# EAGLE board main (1) (EAGLE 9.6.2)
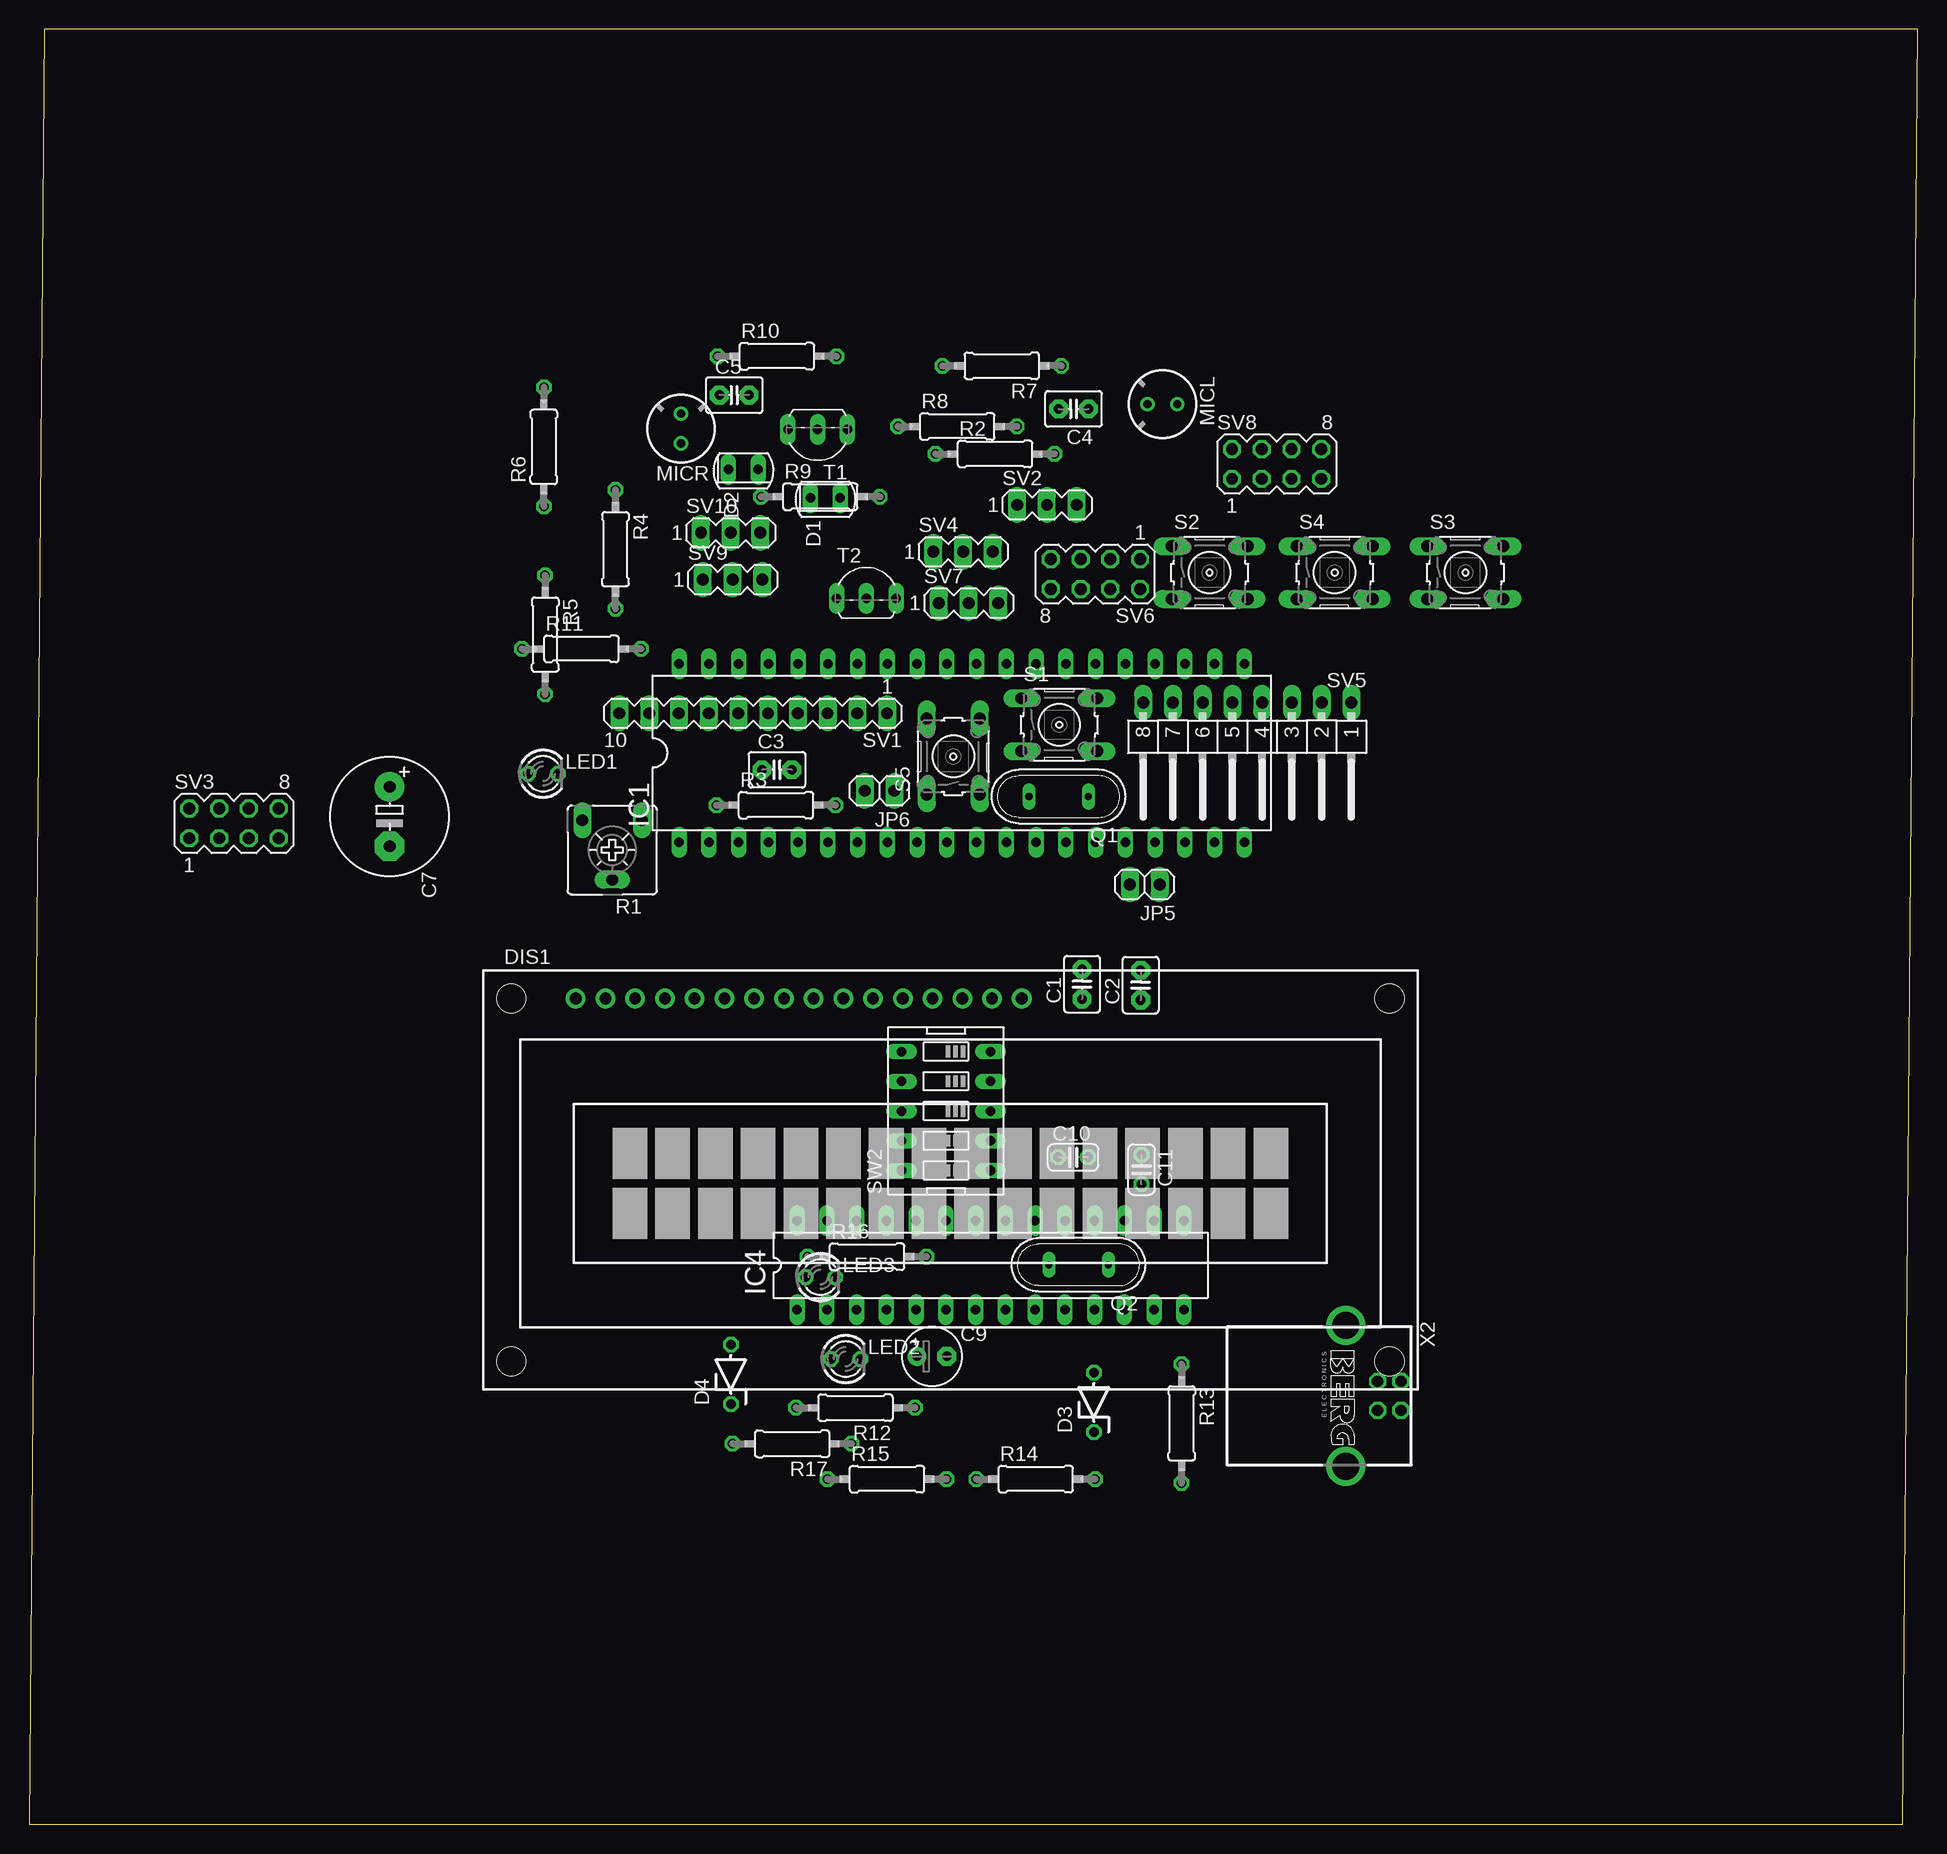
[diagram p0: board, top side]
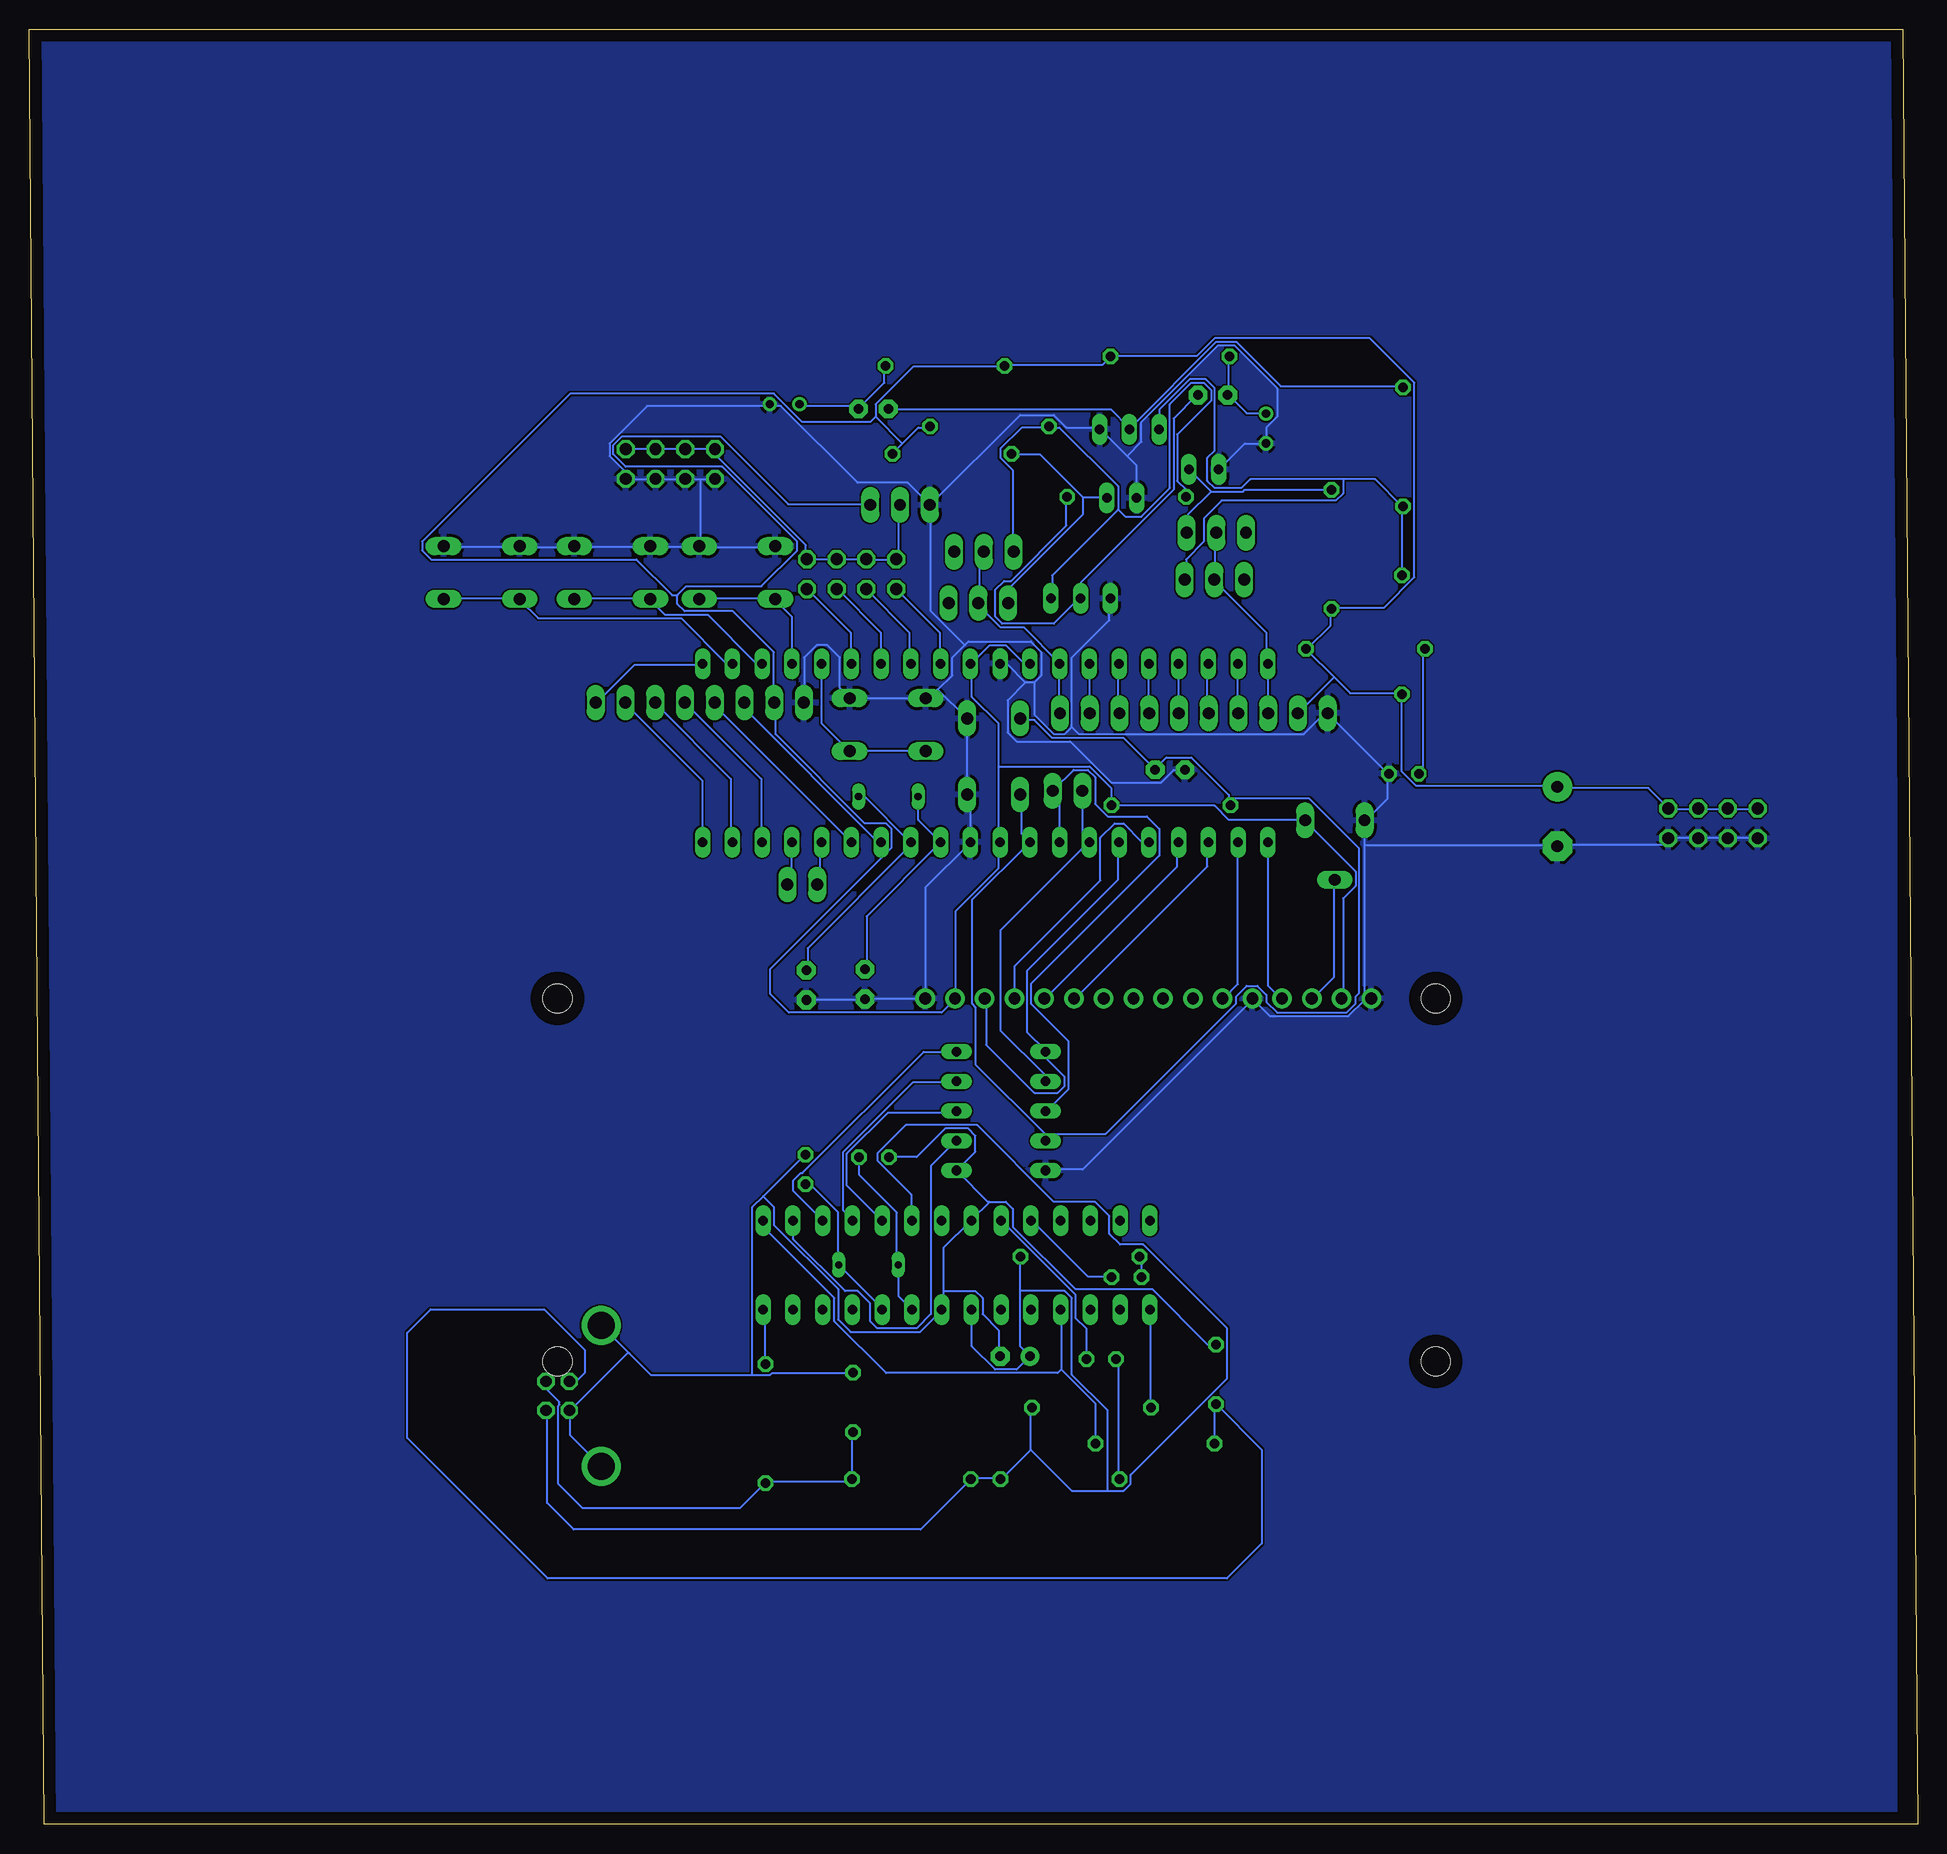
[diagram p1: board, bottom side, seen from below]

Size 161.27 x 153.34 mm. Coordinates in mm from the lower left corner, seen from the top.
Outline: 0,0 160,0 161.27,153.34 1.27,153.34 0,0
Copper layers (1*16): Top 0.035mm / dielectric 1.5mm / Bottom 0.035mm
Design rules "default": minimum track width 6mil, minimum drill 0.35mm, track to track 6mil, track to pad 6mil, pad to pad 6mil, via to via 6mil, smd to smd 6mil, copper to edge 40mil, drill to drill 6mil, minimum pad ring 10mil, minimum via ring 8mil, stop-mask expansion 4mil, vias tented up to drill 0mil, thermal gap 10mil

## Footprints (pad centres in the part's own frame; a part is rotated, then mirrored left to right if it is on the bottom)
C2.5-3 = drill 0.813 pad 1.6 octagon: 1 -1.27,0; 2 1.27,0
E5-10,5 = drill 1.016 pad 2.54: + -2.54,0 | drill 1.016 pad 2.54 octagon: - 2.54,0
E2,5-5 = drill 0.813 pad 1.6: + -1.27,0 | drill 0.813 pad 1.6 octagon: - 1.27,0
C025-024X044 = drill 0.813 octagon: 1 -1.27,0; 2 1.27,0
SFH225 = drill 0.813 long: A 0,1.27; K 0,-1.27
ZDIO-5 = drill 0.813 octagon: A 2.54,0; C -2.54,0
TUXGR_16X2_R2 = drill 1 pad 1.676: 1 -32,15.5; 2 -29.46,15.5; 3 -26.92,15.5; 4 -24.38,15.5; 5 -21.84,15.5; 6 -19.3,15.5; 7 -16.76,15.5; 8 -14.22,15.5; 9 -11.68,15.5; 10 -9.14,15.5; 11 -6.6,15.5; 12 -4.06,15.5; 13 -1.52,15.5; 14 1.02,15.5; 15 3.56,15.5; 16 6.1,15.5 | hole 2.5: -37.5,-15.5; 37.5,-15.5; -37.5,15.5; 37.5,15.5
DIL40 = drill 0.813 long: 1 -24.13,-7.62; 2 -21.59,-7.62; 3 -19.05,-7.62; 4 -16.51,-7.62; 5 -13.97,-7.62; 6 -11.43,-7.62; 7 -8.89,-7.62; 8 -6.35,-7.62; 9 -3.81,-7.62; 10 -1.27,-7.62; 11 1.27,-7.62; 12 3.81,-7.62; 13 6.35,-7.62; 14 8.89,-7.62; 15 11.43,-7.62; 16 13.97,-7.62; 17 16.51,-7.62; 18 19.05,-7.62; 19 21.59,-7.62; 20 24.13,-7.62; 21 24.13,7.62; 22 21.59,7.62; 23 19.05,7.62; 24 16.51,7.62; 25 13.97,7.62; 26 11.43,7.62; 27 8.89,7.62; 28 6.35,7.62; 29 3.81,7.62; 30 1.27,7.62; 31 -1.27,7.62; 32 -3.81,7.62; 33 -6.35,7.62; 34 -8.89,7.62; 35 -11.43,7.62; 36 -13.97,7.62; 37 -16.51,7.62; 38 -19.05,7.62; 39 -21.59,7.62; 40 -24.13,7.62
DIL28-3 = drill 0.813 long: 1 -16.51,-3.81; 2 -13.97,-3.81; 3 -11.43,-3.81; 4 -8.89,-3.81; 5 -6.35,-3.81; 6 -3.81,-3.81; 7 -1.27,-3.81; 8 1.27,-3.81; 9 3.81,-3.81; 10 6.35,-3.81; 11 8.89,-3.81; 12 11.43,-3.81; 13 13.97,-3.81; 14 16.51,-3.81; 15 16.51,3.81; 16 13.97,3.81; 17 11.43,3.81; 18 8.89,3.81; 19 6.35,3.81; 20 3.81,3.81; 21 1.27,3.81; 22 -1.27,3.81; 23 -3.81,3.81; 24 -6.35,3.81; 25 -8.89,3.81; 26 -11.43,3.81; 27 -13.97,3.81; 28 -16.51,3.81
1X02 = drill 1.016 long: 1 -1.27,0; 2 1.27,0
LED3MM = drill 0.813 octagon: A -1.27,0; K 1.27,0
F6050AP = drill 0.7 pad 1.2: 1 0,1.27; 2 0,-1.27
QS = drill 0.61 long: 1 -2.54,0; 2 2.54,0
CA6V = drill 1.016 long: A -2.54,-2.54; E 2.54,-2.54; S 0,2.54
0207/10 = drill 0.813 octagon: 1 -5.08,0; 2 5.08,0
B3F-10XX = drill 1.016 long: 1 -3.251,2.261; 2 3.251,2.261; 3 -3.251,-2.261; 4 3.251,-2.261
MA10-1 = drill 1.016 long: 1 -11.43,0; 2 -8.89,0; 3 -6.35,0; 4 -3.81,0; 5 -1.27,0; 6 1.27,0; 7 3.81,0; 8 6.35,0; 9 8.89,0; 10 11.43,0
MA03-1 = drill 1.016 long: 1 -2.54,0; 2 0,0; 3 2.54,0
MA04-2 = drill 1.016 octagon: 1 -3.81,-1.27; 2 -3.81,1.27; 3 -1.27,-1.27; 4 -1.27,1.27; 5 1.27,-1.27; 6 1.27,1.27; 7 3.81,-1.27; 8 3.81,1.27
MA08-1W = drill 1.016 long: 1 -8.89,0; 2 -6.35,0; 3 -3.81,0; 4 -1.27,0; 5 1.27,0; 6 3.81,0; 7 6.35,0; 8 8.89,0
EDG-05 = drill 0.813 long: 1 -5.08,-3.81; 2 -2.54,-3.81; 3 0,-3.81; 4 2.54,-3.81; 5 5.08,-3.81; 6 5.08,3.81; 7 2.54,3.81; 8 0,3.81; 9 -2.54,3.81; 10 -5.08,3.81
TO92-EBC = drill 0.813 long: B 0,-1.27; C 2.54,-1.27; E -2.54,-1.27
PN61729-S = drill 0.95 octagon: 1 1.25,4.71; 2 -1.25,4.71; 3 -1.25,2.71; 4 1.25,2.71 | drill 2.3 pad 2.9: S1 -6.02,0; S2 6.02,0

## Placement (x,y rotation side)
C1  22p  [C2.5-3]  89.91,71.77 90 top
C2  22p  [C2.5-3]  94.91,71.69 90 top
C3  10nF  [C2.5-3]  63.85,90.09 0 top
C4  100nF  [C2.5-3]  89.18,120.91 180 top
C5  100nF  [C2.5-3]  60.2,122.09 0 top
C7  1000uF/16V  [E5-10,5]  30.77,86.09 270 top
C9  10uF/16V  [E2,5-5]  77.09,39.98 0 top
C10  22pF  [C025-024X044]  89.14,56.98 0 top
C11  22pF  [C025-024X044]  94.98,55.94 270 top
D1  SFH225  [SFH225]  67.98,113.31 270 top
D2  SFH225  [SFH225]  60.98,115.74 270 top
D3  DZ3,6V  [ZDIO-5]  90.91,36.06 90 top
D4  DZ3,6V  [ZDIO-5]  59.91,38.44 90 top
DIS1  TUXGR_16X2_R2  [TUXGR_16X2_R2]  78.66,55.05 0 top
IC1  MEGA16-P  [DIL40]  79.63,91.53 0 top
IC4  MEGA8-P  [DIL28-3]  82.09,47.77 0 top
JP5  [1X02]  95.26,80.29 180 top
JP6  [1X02]  72.61,88.29 180 top
LED1  merah  [LED3MM]  43.88,89.76 0 top
LED2  Merah  [LED3MM]  69.72,39.76 0 top
LED3  hijau  [LED3MM]  67.56,46.76 0 top
MICL  MC  [F6050AP]  96.77,121.31 270 top
MICR  MC  [F6050AP]  55.66,119.23 180 top
Q1  8MHz  [QS]  87.91,87.8 180 top
Q2  12MHz  [QS]  89.61,47.8 180 top
R1  20K  [CA6V]  49.78,83.23 180 top
R2  56K  [0207/10]  82.47,117.06 0 top
R3  10K  [0207/10]  63.77,87.06 0 top
R4  56K  [0207/10]  50.06,108.93 270 top
R5  10K  [0207/10]  44.06,101.63 270 top
R6  100K  [0207/10]  43.94,117.67 90 top
R7  10K  [0207/10]  83.05,124.59 180 top
R8  10K  [0207/10]  79.25,119.41 0 top
R9  100K  [0207/10]  67.55,113.41 0 top
R10  10K  [0207/10]  63.85,125.41 0 top
R11  330  [0207/10]  47.15,100.41 0 top
R12  10K  [0207/10]  70.55,35.59 180 top
R13  68  [0207/10]  98.41,34.25 270 top
R14  2K2  [0207/10]  85.95,29.49 0 top
R15  330  [0207/10]  73.25,29.49 0 top
R16  330  [0207/10]  71.55,48.49 0 top
R17  68  [0207/10]  65.15,32.51 180 top
S1  [B3F-10XX]  87.96,93.93 0 top
S2  [B3F-10XX]  100.8,106.93 0 top
S3  [B3F-10XX]  122.64,106.93 0 top
S4  [B3F-10XX]  111.48,106.93 0 top
S5  [B3F-10XX]  78.91,91.22 90 top
SV1  [MA10-1]  61.82,94.91 180 top
SV2  [MA03-1]  86.91,112.71 0 top
SV3  [MA04-2]  17.48,85.5 0 top
SV4  [MA03-1]  79.75,108.71 0 top
SV5  [MA08-1W]  104.01,95.82 180 top
SV6  [MA04-2]  91.05,106.8 180 top
SV7  [MA03-1]  80.22,104.33 0 top
SV8  [MA04-2]  106.52,116.2 0 top
SV9  [MA03-1]  60.06,106.33 0 top
SV10  [MA03-1]  59.9,110.33 0 top
SW2  [EDG-05]  78.28,60.94 90 top
T1  [TO92-EBC]  67.33,117.91 180 top
T2  [TO92-EBC]  71.49,105.98 0 top
X2  PN61729-S  [PN61729-S]  112.43,36.6 270 top

## Library data of the parts
C1-C5 = capacitor-wima
C7 C9-C11 R2-R11 = rcl
D1 D2 = opto-trans-siemens; OC_FARNELL: unknown; OC_NEWARK: unknown
D3 D4 = diode
DIS1 = display-lcd; OC_FARNELL: unknown; OC_NEWARK: unknown
IC1 = atmel; MPN: ATMEGA16-16PU; OC_FARNELL: 9171142; OC_NEWARK: 01M6885
IC4 = atmel
JP5 JP6 = pinhead
LED1-LED3 = led
MICL MICR = microphon
Q1 Q2 SW2 = special
R1 = pot
R12-R17 = resistor
S1-S5 = switch-omron; MPN: B3F-1000; OC_FARNELL: 176432; OC_NEWARK: 36M3542
SV1-SV10 = con-lstb; OC_FARNELL: unknown; OC_NEWARK: unknown
T1 T2 = transistor
X2 = con-berg

## Nets
DGND: C9.- C10.1 C11.1 D3.A D4.A IC4.8 IC4.22 SW2.1 X2.4 X2.S1 X2.S2
GND: C1.1 C2.1 C3.1 C7.- D1.K D2.K DIS1.1 DIS1.5 DIS1.16 IC1.11 IC1.31 LED1.K MICL.1 MICR.1 R1.E S1.1 S1.2 S2.1 S2.2 S3.1 S3.2 S4.1 S4.2 S5.3 S5.4 SV1.10 SV2.1 SV3.1 SV3.3 SV3.5 SV3.7 SV5.8 SV8.1 SV8.3 SV8.5 SV8.7 SW2.10 T1.E T2.E
MISO: IC1.7 JP6.2 SW2.7
MOSI: DIS1.14 IC1.6 SW2.6
N$1: IC1.33 SV1.1 SV4.2 SV7.2
N$2: IC1.34 SV1.2
N$3: IC1.35 SV1.3
N$4: IC1.36 SV1.4
N$5: IC1.37 SV1.5
N$6: IC1.38 SV1.6
N$7: IC1.39 SV1.7
N$8: D2.A R4.1 SV10.3
N$9: IC1.24 S2.3 S2.4
N$10: DIS1.13 IC1.5
N$11: DIS1.12 IC1.4
N$12: DIS1.11 IC1.3
N$13: DIS1.6 IC1.2
N$14: R5.1 R6.1 SV9.3 T1.C
N$15: DIS1.3 R1.S
N$16: C1.2 IC1.12 Q1.2
N$17: C2.2 IC1.13 Q1.1
N$18: DIS1.4 IC1.1
N$19: D1.A R2.1 SV7.1
N$20: IC1.23 S4.3 S4.4
N$21: IC1.40 SV1.8 SV9.2 SV10.2
N$22: C4.2 R6.2 T1.B
N$23: C4.1 MICL.2 R7.1
N$24: R8.1 R9.1 SV4.1 T2.C
N$25: C5.2 R9.2 T2.B
N$26: C5.1 MICR.2 R10.1
N$27: IC1.22 S3.3 S3.4
N$28: IC1.25 S1.3 S1.4
N$30: IC1.21 SV5.1
N$32: IC1.20 SV5.2
N$33: IC1.19 SV5.3
N$34: IC1.18 SV5.4
N$35: IC1.15 SV5.5
N$36: IC1.14 SV5.6
N$37: IC1.16 JP5.2
N$38: IC1.17 JP5.1
N$41: LED1.A R11.1
N$42: IC4.1 R12.2
N$44: IC1.26 SV6.2
N$45: IC1.27 SV6.4
N$46: IC1.28 SV6.6
N$47: IC1.29 SV6.8
N$51: C10.2 IC4.9 Q2.2
N$52: C11.2 IC4.10 Q2.1
N$53: IC4.14 R13.1
N$55: LED2.A R15.1
N$56: LED3.A R16.1
N$57: IC4.23 LED2.K
N$58: IC4.24 LED3.K
N$59: D4.C R17.2 X2.3
N$67: IC4.4 IC4.15 R17.1
N$69: D3.C R13.2 R14.2 X2.2
N$175: IC4.17 SW2.5
N$176: IC4.18 SW2.4
N$177: IC4.19 SW2.3
N$178: IC4.16 SW2.2
RESET: C3.2 IC1.9 R3.1 S5.1 S5.2 SW2.9
SCK: IC1.8 JP6.1 SW2.8
VCC: C7.+ DIS1.2 DIS1.15 IC1.10 IC1.30 IC1.32 R1.A R2.2 R3.2 R4.2 R5.2 R7.2 R8.2 R10.2 R11.2 SV1.9 SV2.3 SV3.2 SV3.4 SV3.6 SV3.8 SV5.7
VDD: SV2.2 SV6.1 SV6.3 SV6.5 SV6.7 SV8.2 SV8.4 SV8.6 SV8.8
VPP: C9.+ IC4.7 IC4.20 R12.1 R14.1 R15.2 R16.2 X2.1

## Tracks (layer width: path | path; a pad name or v marks a point on that pad's centre or on a via)
DGND
  Bottom 0.152: 79.25,53.19 77.88,53.19 77.27,52.58 77.27,51.05 71.93,45.72 65.38,45.72 60.66,41 60.05,41 D4.A | 79.25,53.19 80.77,51.66 IC4.22 80.92,51.51 83.21,49.23 83.21,45.57 | 83.21,45.57 83.21,44.04 IC4.8 83.36,43.89 85.19,42.06 91.14,42.06 92.2,43.13 92.2,45.72 97.69,51.21 97.69,52.73 98.6,53.65 | 79.25,53.19 79.4,53.19 81.99,55.78 SW2.1 81.99,55.93 80.47,57.45 80.47,58.83 81.08,59.44 83.06,59.44 85.5,57 87.78,57 C10.1 | 83.21,45.57 80.47,45.57 79.86,44.96 79.86,43.59 78.49,42.22 78.49,40.08 C9.- | X2.S2 112.47,30.63 115.06,33.22 115.06,35.2 X2.4 115.06,35.36 110.19,40.23 110.03,40.23 | 99.52,38.41 108.2,38.41 110.03,40.23 | 99.52,38.41 97.99,38.41 97.84,38.56 90.98,38.56 D3.A | 110.03,40.23 112.32,42.52 X2.S1 | 98.6,53.65 99.52,52.73 99.52,38.41 | 98.6,53.65 95.1,57.15 C11.1
GND
  Bottom 0.152: SV3.1 13.72,84.28 16.15,84.28 SV3.3 16.31,84.28 18.75,84.28 SV3.5 18.9,84.28 21.18,84.28 SV3.7 21.34,84.12 21.79,83.67 30.63,83.67 C7.- 30.79,83.67 47.24,83.67 | SW2.10 74.37,55.93 71.32,55.93 56.84,70.41 DIS1.5 56.69,70.41 55.32,69.04 48.62,69.04 47.24,70.41 | 47.24,70.41 46.79,70.41 DIS1.1 47.24,70.41 | 47.24,70.41 47.24,83.67 | 47.24,83.67 47.24,85.65 R1.E 47.09,85.8 45.26,87.63 45.26,89.61 LED1.K 45.26,89.76 50.29,94.79 SV1.10 50.44,94.79 50.75,94.79 52.43,93.12 71.63,93.12 72.24,93.73 | S3.2 125.88,109.12 119.48,109.12 S3.1 119.33,109.12 114.76,109.12 S4.2 114.61,109.12 108.36,109.12 S4.1 108.2,109.12 104.09,109.12 S2.2 | 103.94,114.91 105.16,114.91 SV8.3 105.31,114.91 107.75,114.91 SV8.5 107.9,114.91 110.19,114.91 SV8.7 110.34,115.06 110.34,115.52 111.71,116.89 111.71,117.96 108.51,121.16 98.15,121.16 MICL.1 97.99,121.16 97.08,121.16 90.53,114.61 86.26,114.61 84.43,112.78 SV2.1 | 103.94,114.91 102.72,114.91 SV8.1 | S2.1 97.69,109.12 103.94,109.12 S2.2 | 103.94,114.91 103.94,109.27 S2.2 | D2.K 59.59,115.82 57.45,117.96 55.78,117.96 MICR.1 55.63,118.11 55.63,119.33 54.71,120.24 54.71,122.68 58.37,126.34 59.74,126.34 66.29,119.79 66.29,118.11 67.51,116.89 | 67.51,116.89 69.8,119.18 T1.E 69.95,119.33 72.69,119.33 73.76,120.4 76.66,120.4 84.28,112.78 SV2.1 | 67.51,116.89 66.75,116.13 66.75,113.39 D1.K | C2.1 94.79,70.41 89.92,70.41 C1.1 89.76,70.56 84.89,70.56 DIS1.16 84.73,70.56 84.73,80.01 80.92,83.82 IC1.11 80.92,83.97 80.92,87.78 81.08,87.94 S5.3 81.23,88.09 81.23,94.34 S5.4 81.23,94.49 83.67,96.93 | 76.2,97.54 77.72,99.06 78.33,99.06 IC1.31
  Bottom 0.152: 75.44,97.54 76.2,97.54 | 75.44,97.54 74.83,98.15 74.83,100.13 75.74,101.04 81.08,101.04 81.38,100.74 | 81.38,100.74 82.45,99.67 82.45,98.15 83.67,96.93 | 83.67,96.93 84.28,96.32 84.58,96.32 S1.1 | 72.24,93.73 72.24,99.67 69.04,102.87 69.04,104.7 T2.E | 72.24,93.73 72.85,93.12 73.76,93.12 75.44,94.79 75.44,97.54 | 83.67,96.93 S1.1 | S1.1 84.73,96.16 91.14,96.16 S1.2 91.29,96.32 92.05,97.08 92.05,99.67 93.12,100.74 94.03,100.74 95.1,99.67 95.1,95.86 SV5.8 | 76.2,97.54 77.72,96.01 77.72,93.27 76.96,92.51 72.39,92.51 68.89,89 64.62,89 63.55,90.07 62.64,90.07 C3.1 | 81.38,100.74 84.28,103.63 84.28,112.62 SV2.1
  pour Bottom: 2,152 2,1 3,0 159,0 160,1 160,153 3,153
MISO
  Bottom 0.152: SW2.7 74.52,63.55 74.52,64.01 78.33,67.82 78.33,76.35 70.87,83.82 IC1.7 70.87,83.97 71.32,84.43 71.32,88.24 JP6.2
MOSI
  Bottom 0.152: DIS1.14 79.55,70.41 79.55,66.6 75.44,62.48 73.46,62.48 72.85,63.09 72.85,63.86 74.37,65.38 74.37,65.99 SW2.6 74.52,66.14 76.05,67.67 76.05,72.93 68.28,80.7 68.28,83.82 IC1.6
N$1
  Bottom 0.152: SV1.1 73.3,94.94 73.3,99.06 IC1.33 73.3,99.21 76.35,102.26 78.33,102.26 80.31,104.24 SV7.2 80.16,104.39 80.16,108.36 79.86,108.66 SV4.2
N$2
  Bottom 0.152: IC1.34 70.71,99.06 70.71,94.94 SV1.2
N$3
  Bottom 0.152: IC1.35 68.28,99.06 68.28,94.94 SV1.3
N$4
  Bottom 0.152: IC1.36 65.68,99.06 65.68,94.94 SV1.4
N$5
  Bottom 0.152: IC1.37 63.09,99.06 63.09,94.94 SV1.5
N$6
  Bottom 0.152: IC1.38 60.66,99.06 60.66,94.94 SV1.6
N$7
  Bottom 0.152: IC1.39 58.06,99.06 58.06,94.94 SV1.7
N$8
  Bottom 0.152: 60.35,113.84 57.61,113.84 57.45,114 50.14,114 R4.1 | 60.35,113.84 62.18,115.67 D2.A | 60.35,113.84 62.33,111.86 62.33,110.34 SV10.3
N$9
  Bottom 0.152: IC1.24 96.16,99.21 96.16,103.17 97.54,104.55 S2.3 97.69,104.7 103.94,104.7 S2.4
N$10
  Bottom 0.152: IC1.5 65.68,83.97 66.29,83.97 67.82,85.5 68.58,85.5 69.8,84.28 69.8,80.64 77.11,73.32 77.11,70.56 DIS1.13
N$11
  Bottom 0.152: IC1.4 63.25,83.82 63.25,81.84 74.52,70.56 DIS1.12
N$12
  Bottom 0.152: IC1.3 60.66,83.82 60.66,81.84 71.93,70.56 DIS1.11
N$13
  Bottom 0.152: IC1.2 58.06,83.82 58.06,71.78 59.28,70.56 DIS1.6
N$14
  Bottom 0.152: R5.1 44.04,106.83 44.04,112.47 R6.1 44.04,112.62 46.33,114.91 49.07,114.91 | 49.07,114.91 57,114.91 57.76,114.15 60.05,114.15 60.66,114.76 60.66,116.74 60.05,117.35 60.05,122.68 60.81,123.44 62.18,123.44 64.77,120.85 64.77,119.33 T1.C | 49.07,114.91 49.07,113.69 49.68,113.08 59.44,113.08 60.96,111.56 60.96,109.58 62.48,108.05 62.48,106.38 SV9.3
N$15
  Bottom 0.152: R1.S 49.84,80.62 49.84,72.39 51.66,70.56 DIS1.3
N$16
  Bottom 0.152: Q1.2 85.34,87.78 85.34,85.8 83.52,83.97 IC1.12 83.52,83.82 89.76,77.57 89.76,73.15 C1.2
N$17
  Bottom 0.152: Q1.1 90.37,87.78 89.92,87.78 86.11,83.97 IC1.13 86.11,83.82 86.11,83.52 94.79,74.83 94.79,73 C2.2
N$18
  Bottom 0.152: IC1.1 55.47,83.82 55.47,71.63 54.41,70.56 DIS1.4
N$19
  Bottom 0.152: 71.32,113.39 69.34,113.39 D1.A | 71.32,113.39 74.98,117.04 77.27,117.04 R2.1 | 71.32,113.39 71.32,111.86 77.57,105.61 77.57,104.39 SV7.1
N$20
  Bottom 0.152: IC1.23 98.75,99.21 99.21,99.21 103.33,103.33 106.98,103.33 108.2,104.55 S4.3 108.36,104.7 114.61,104.7 S4.4
N$21
  Bottom 0.152: SV1.8 55.47,94.94 55.47,99.06 IC1.40 55.63,99.21 55.63,101.8 60.05,106.22 SV9.2 60.05,106.38 60.05,110.19 SV10.2
N$22
  Bottom 0.152: R6.2 44.04,122.83 54.41,122.83 58.22,126.64 59.89,126.64 67.21,119.33 T1.B 67.36,119.33 68.89,120.85 87.78,120.85 C4.2
N$23
  Bottom 0.152: MICL.2 95.4,121.16 90.68,121.16 90.53,121.01 C4.1 90.37,121.01 88.24,123.14 88.24,124.51 R7.1
N$24
  Bottom 0.152: 68.28,112.32 73.91,106.68 73.91,104.85 T2.C | 68.28,112.32 68.28,114.3 73.3,119.33 74.07,119.33 R8.1 74.22,119.33 76.5,119.33 78.33,117.5 78.33,116.74 77.27,115.67 77.27,108.81 SV4.1 | 68.28,112.32 67.67,111.71 66.29,111.71 63.86,114.15 63.86,121.31 62.03,123.14 60.96,123.14 60.35,122.53 60.35,121.61 63.25,118.72 63.25,114.76 62.48,114 62.48,113.54 R9.1
N$25
  Bottom 0.152: C5.2 61.57,122.07 63.55,120.09 63.55,114 71.48,106.07 71.48,104.85 T2.B 71.63,104.7 73.76,102.56 78.18,102.56 78.79,103.17 78.79,105.46 78.03,106.22 77.42,106.22 72.69,110.95 72.69,113.39 R9.2
N$26
  Bottom 0.152: MICR.2 55.78,120.55 57.3,120.55 58.83,122.07 C5.1 58.83,122.22 58.83,125.27 R10.1
N$27
  Bottom 0.152: IC1.22 101.35,99.21 101.8,99.21 105.61,103.02 117.81,103.02 119.33,104.55 S3.3 119.48,104.7 125.88,104.7 S3.4
N$28
  Bottom 0.152: IC1.25 93.57,99.06 93.57,94.03 91.29,91.75 S1.4 91.14,91.75 84.73,91.75 S1.3
N$30
  Bottom 0.152: IC1.21 103.78,99.06 109.58,99.06 112.78,95.86 SV5.1
N$32
  Bottom 0.152: IC1.20 103.78,83.97 103.78,89.15 110.34,95.71 SV5.2
N$33
  Bottom 0.152: IC1.19 101.35,83.97 101.35,89.31 107.75,95.71 SV5.3
N$34
  Bottom 0.152: IC1.18 98.75,83.97 98.75,89.31 105.16,95.71 SV5.4
N$35
  Bottom 0.152: IC1.15 91.14,83.97 102.87,95.71 SV5.5
N$36
  Bottom 0.152: IC1.14 88.54,83.97 88.85,83.97 100.13,95.25 100.13,95.71 SV5.6
N$37
  Bottom 0.152: IC1.16 93.73,83.82 93.73,80.47 93.88,80.31 JP5.2
N$38
  Bottom 0.152: IC1.17 96.16,83.82 96.16,80.62 96.47,80.31 JP5.1
N$41
  Bottom 0.152: R11.1 42.22,100.28 42.22,90.07 42.52,89.76 LED1.A
N$42
  Bottom 0.152: R12.2 65.53,35.66 65.53,43.89 IC4.1
N$44
  Bottom 0.152: IC1.26 91.14,99.21 91.14,101.8 94.79,105.46 SV6.2
N$45
  Bottom 0.152: IC1.27 88.54,99.21 88.54,101.8 92.2,105.46 SV6.4
N$46
  Bottom 0.152: IC1.28 86.11,99.21 86.11,101.8 89.76,105.46 SV6.6
N$47
  Bottom 0.152: IC1.29 83.52,99.21 83.52,101.8 87.17,105.46 SV6.8
N$51
  Bottom 0.152: IC4.9 85.95,44.04 87.02,45.11 87.02,47.7 Q2.2 87.17,47.85 87.17,52.27 90.37,55.47 90.37,56.84 C10.2
N$52
  Bottom 0.152: IC4.10 88.39,44.04 92.05,47.7 Q2.1 92.2,47.85 92.2,52.27 94.49,54.56 94.94,54.56 C11.2
N$53
  Bottom 0.152: R13.1 98.45,39.47 98.45,43.89 IC4.14
N$55
  Bottom 0.152: R15.1 68.28,29.57 68.28,39.47 68.43,39.62 LED2.A
N$56
  Bottom 0.152: LED3.A 66.29,46.79 66.29,48.31 66.45,48.46 R16.1
N$57
  Bottom 0.152: LED2.K 71.02,39.78 71.02,42.37 71.93,43.28 71.93,45.26 78.18,51.51 IC4.23
N$58
  Bottom 0.152: LED3.K 68.89,46.79 70.87,46.79 75.59,51.51 IC4.24
N$59
  Bottom 0.152: R17.2 60.05,32.61 60.05,35.81 D4.C 56,31.99 56,24 59,21 117,21 129,33 129,42 127,44 117.3,44 116.19,42.89 116.15,42.85 113.82,40.52 113.82,38.58 114.84,37.55 X2.3
N$67
  Bottom 0.152: 73.15,38.86 70.26,35.97 70.26,32.61 R17.1 | 73.15,38.86 73.15,43.89 IC4.4 | 73.15,38.86 73.46,38.56 88.09,38.56 92.51,42.98 92.51,44.96 98.45,50.9 98.45,51.51 IC4.15
N$69
  Bottom 0.152: D3.C 90.98,33.38 90.98,29.57 R14.2 91.14,29.41 91.29,29.26 98.3,29.26 R13.2 100.58,27 114,27 116.1,29.1 116.1,35.75 116,35.84 116,36.08 117.46,37.53 X2.2
N$175
  Bottom 0.152: SW2.5 82.14,65.99 84.89,65.99 95.25,55.63 95.4,55.63 96.01,55.02 96.01,54.1 93.57,51.66 IC4.17
N$176
  Bottom 0.152: SW2.4 82.14,63.4 85.8,63.4 91.75,57.45 91.75,52.43 90.98,51.66 IC4.18
N$177
  Bottom 0.152: SW2.3 82.14,60.81 87.94,60.81 91.44,57.3 91.44,54.56 88.54,51.66 IC4.19
N$178
  Bottom 0.152: IC4.16 96.01,51.51 96.01,49.99 91.59,45.57 90.53,45.57 89.46,44.5 89.46,42.98 88.85,42.37 85.5,42.37 84.28,43.59 84.28,56.24 82.14,58.37 SW2.2
RESET
  Bottom 0.152: 58.83,87.63 58.83,87.94 62.03,91.14 64.16,91.14 65.08,90.22 C3.2 65.23,90.22 67.82,92.81 73.91,92.81 75.44,94.34 76.5,94.34 S5.2 | 58.83,87.63 58.83,87.17 R3.1 58.83,87.63 | 74.52,58.98 74.52,58.52 SW2.9 74.52,58.98 | 74.52,58.98 80.47,64.92 80.47,69.8 80.77,70.1 80.77,78.94 75.89,83.82 IC1.9 75.89,83.97 76.5,84.58 76.5,87.94 S5.1 | 58.83,87.63 51.97,87.63 47.7,83.36 47.7,71.02 48.01,70.71 48.01,70.1 48.77,69.34 54.71,69.34 55.63,70.26 55.63,70.87 56.39,71.63 57.3,71.63 58.22,70.71 58.22,70.1 69.34,58.98 74.52,58.98
SCK
  Bottom 0.152: SW2.8 74.37,60.96 72.54,62.79 72.54,66.9 75.74,70.1 75.74,71.78 64.77,82.75 64.77,85.04 65.84,86.11 69.19,86.11 70.26,87.17 70.26,89.46 70.87,90.07 72.08,90.07 73.76,88.39 JP6.1 73.76,88.24 73.3,87.78 73.3,83.97 IC1.8
VCC
  Bottom 0.152: DIS1.2 49.07,70.56 49.07,79.1 48.01,80.16 48.01,81.38 52.27,85.65 R1.A 52.43,85.8 58.83,85.8 60.05,87.02 68.73,87.02 R3.2 68.89,87.17 68.89,88.54 70.71,90.37 78.49,90.37 | IC1.32 75.89,99.21 76.35,99.21 77.88,100.74 79.25,100.74 80.77,99.21 IC1.30 80.77,99.06 80.77,96.32 78.49,94.03 78.49,90.37 | 105.92,105 105.16,105.77 98.75,105.77 95.71,108.81 95.71,109.58 102.11,115.98 110.34,115.98 111.4,117.04 111.4,117.81 110.64,118.57 102.26,118.57 96.47,112.78 89.46,112.78 SV2.3 | 105.92,105 105.92,104.24 105.31,103.63 101.19,103.63 97.69,100.13 97.69,95.86 SV5.7 97.54,95.71 97.54,93.12 89.92,85.5 88.09,85.5 87.63,85.04 87.63,83.45 98.01,73.07 98.01,70.95 96.4,69.34 83.36,69.34 82.3,70.41 DIS1.15 82.14,70.56 82.14,78.03 78.49,81.69 78.49,83.82 IC1.10 78.49,83.97 78.49,90.37 | 86.72,117.96 87.48,117.2 R2.2 | 86.72,117.96 85.34,119.33 84.43,119.33 R8.2 | 89,120.24 86.72,117.96 | 89,120.24 89,121.31 85.8,124.51 78.03,124.51 R7.2 77.88,124.66 69.65,124.66 69.04,125.27 R10.2 68.89,125.42 61.57,125.42 60.05,126.95 46.79,126.95 42.98,123.14 42.98,106.53 45.57,103.94 49.99,103.94 R4.2 50.14,103.78 50.14,102.41 52.12,100.43 R11.2 52.12,100.28 49.84,97.99 | 49.84,97.99 48.46,96.62 44.2,96.62 R5.2 44.04,96.47 44.04,89.92 42.82,88.7 30.79,88.7 C7.+ 30.63,88.54 23.01,88.54 21.34,86.87 SV3.8 21.18,86.72 18.9,86.72 SV3.6 18.75,86.72 16.31,86.72 SV3.4 16.15,86.72 13.72,86.72 SV3.2 | 49.84,97.99 52.88,94.94 SV1.9 | 105.92,105 106.38,105 109.42,108.05 126.95,108.05 127.71,108.81 127.71,109.58 115.06,122.22 97.69,122.22 95.25,119.79 89.46,119.79 89,120.24
VDD
  Bottom 0.152: SV8.8 110.19,117.5 107.9,117.5 SV8.6 107.75,117.5 105.31,117.5 SV8.4 105.16,117.5 102.72,117.5 SV8.2 102.56,117.35 102.56,116.89 94.94,109.27 94.94,108.2 SV6.1 94.79,108.05 92.35,108.05 SV6.3 92.2,108.05 89.92,108.05 SV6.5 89.76,108.05 87.33,108.05 SV6.7 87.17,108.2 87.02,108.36 87.02,112.62 SV2.2
VPP
  Bottom 0.152: IC4.7 80.77,43.89 80.77,40.84 78.79,38.86 76.96,38.86 75.89,39.93 C9.+ 75.89,40.08 76.66,40.84 76.66,45.57 | 76.66,45.57 76.66,48.46 R16.2 | 75.74,32 75.74,35.51 R12.1 | 75.74,32 78.18,29.57 R15.2 78.33,29.57 80.77,29.57 R14.1 80.92,29.41 85.14,25.19 114.78,25.19 117.04,27.46 117.04,35.2 X2.1 | 69.19,28.5 72.24,28.5 75.74,32 | 69.19,28.5 67.82,28.5 67.21,29.11 67.21,29.87 58.98,38.1 58.98,42.37 66.14,49.53 68.12,49.53 69.04,50.44 69.04,51.97 70.26,53.19 73.76,53.19 80.31,59.74 86.41,59.74 88.85,57.3 88.85,56.69 85.95,53.8 85.95,51.66 IC4.20 | 76.66,45.57 72.85,45.57 72.24,44.96 72.24,38.41 69.19,35.36 69.19,28.5